# Altium PCB Plata.PcbDoc
Units mm, origin at the board's own origin, x right, y up, seen from the top; angles counter-clockwise.
Board outline 120 x 100 mm, 2 copper layers (Top Layer, Bottom Layer), stack 2.036 mm thick; 31 components, 28 nets, 100 pads, 0 vias.
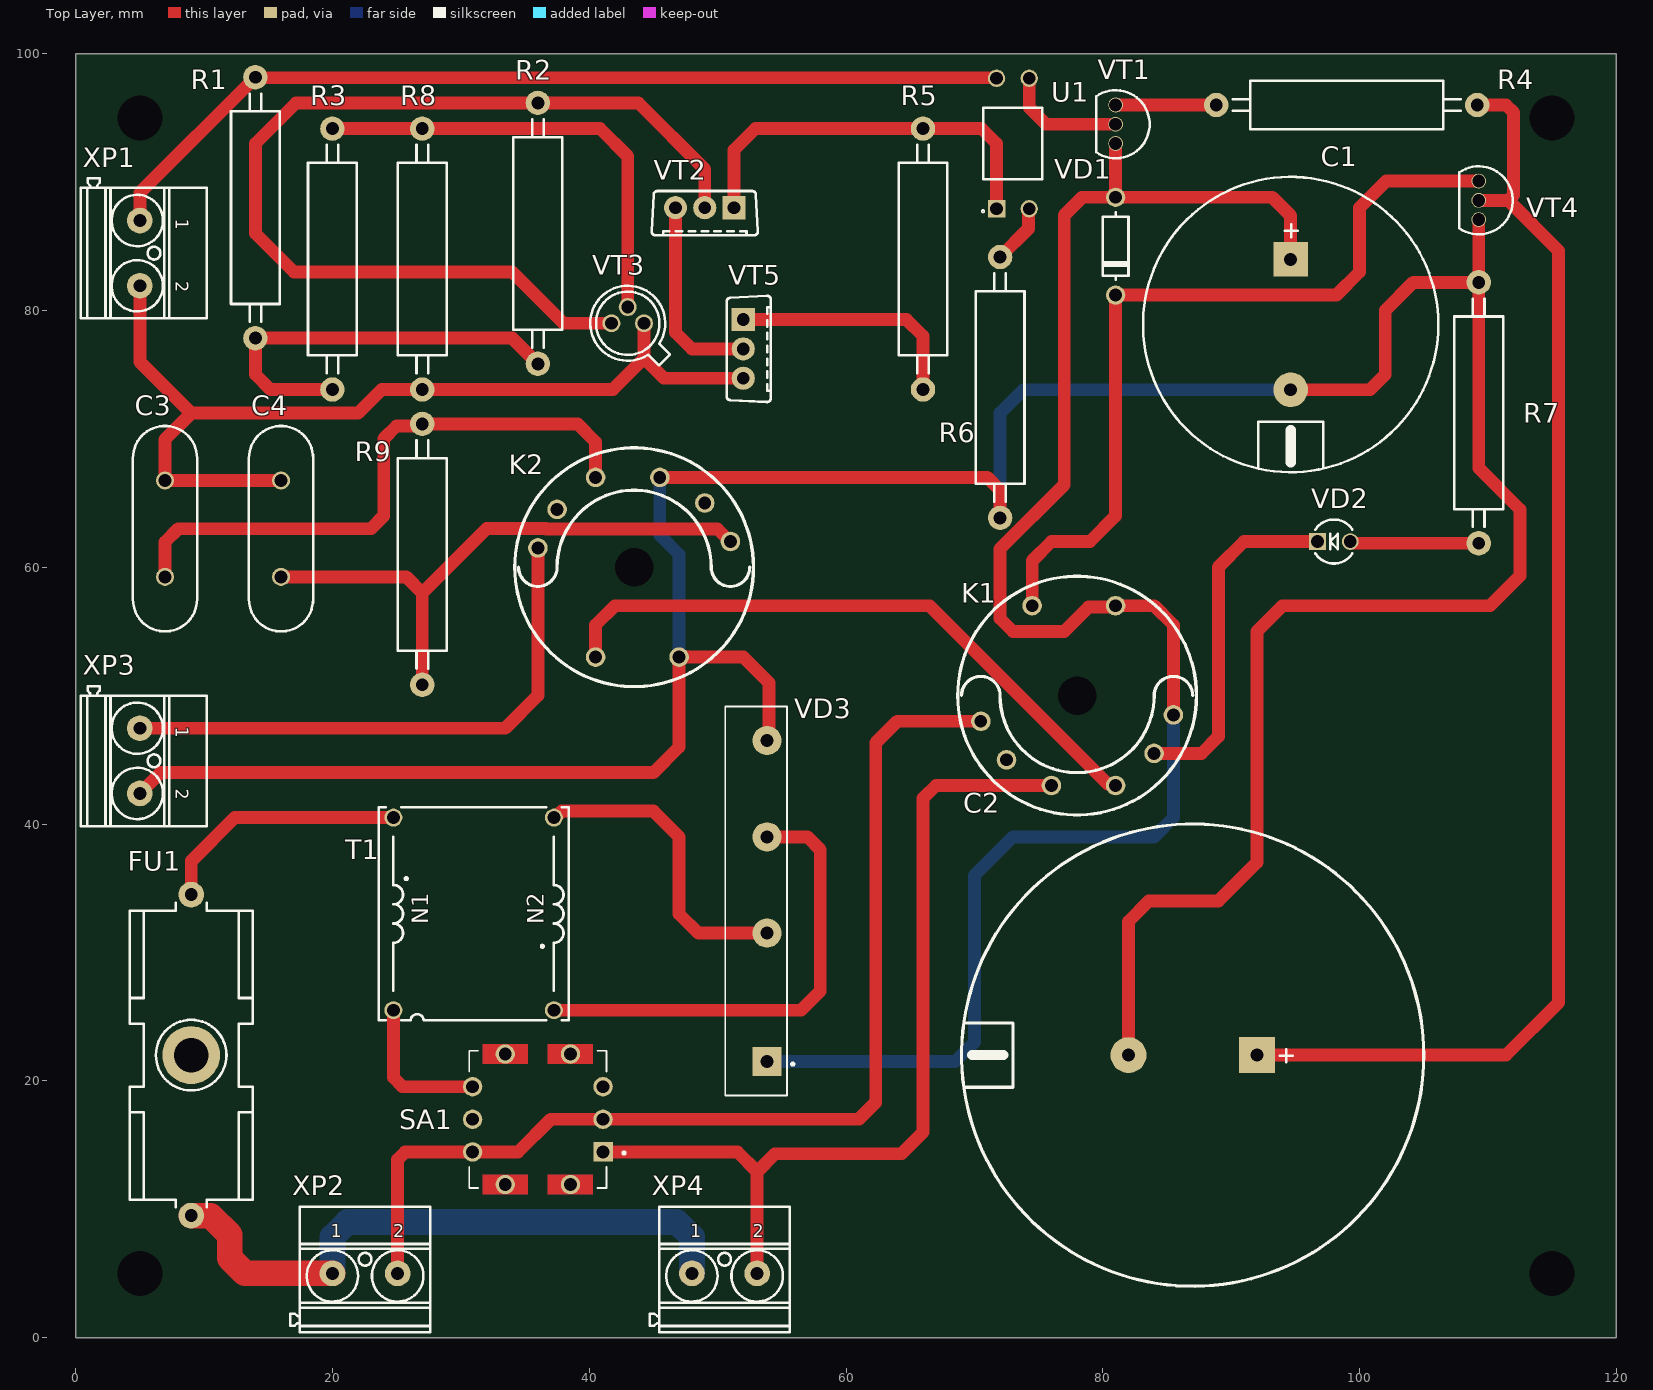
[diagram p0: Top Layer view]
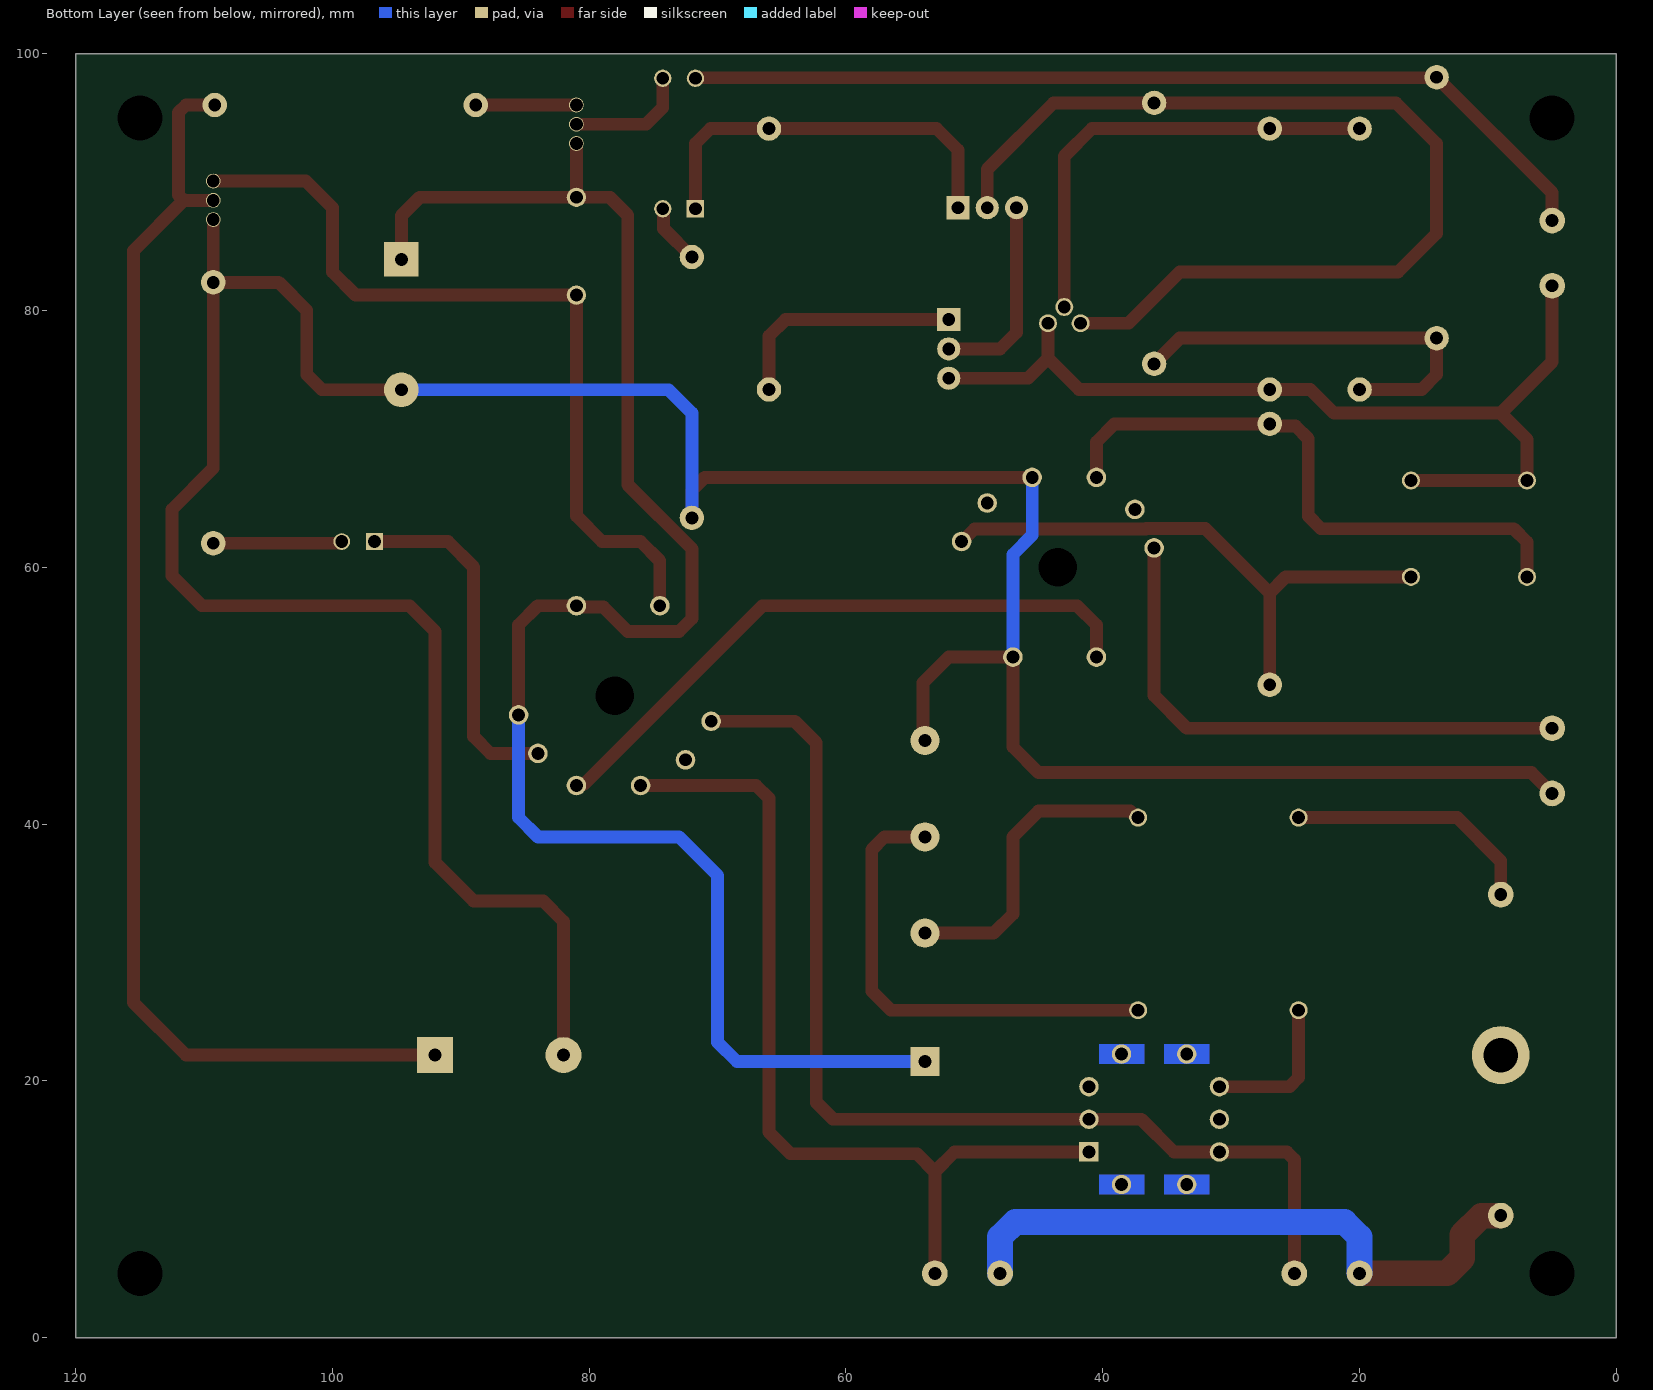
[diagram p1: Bottom Layer view, seen from below]
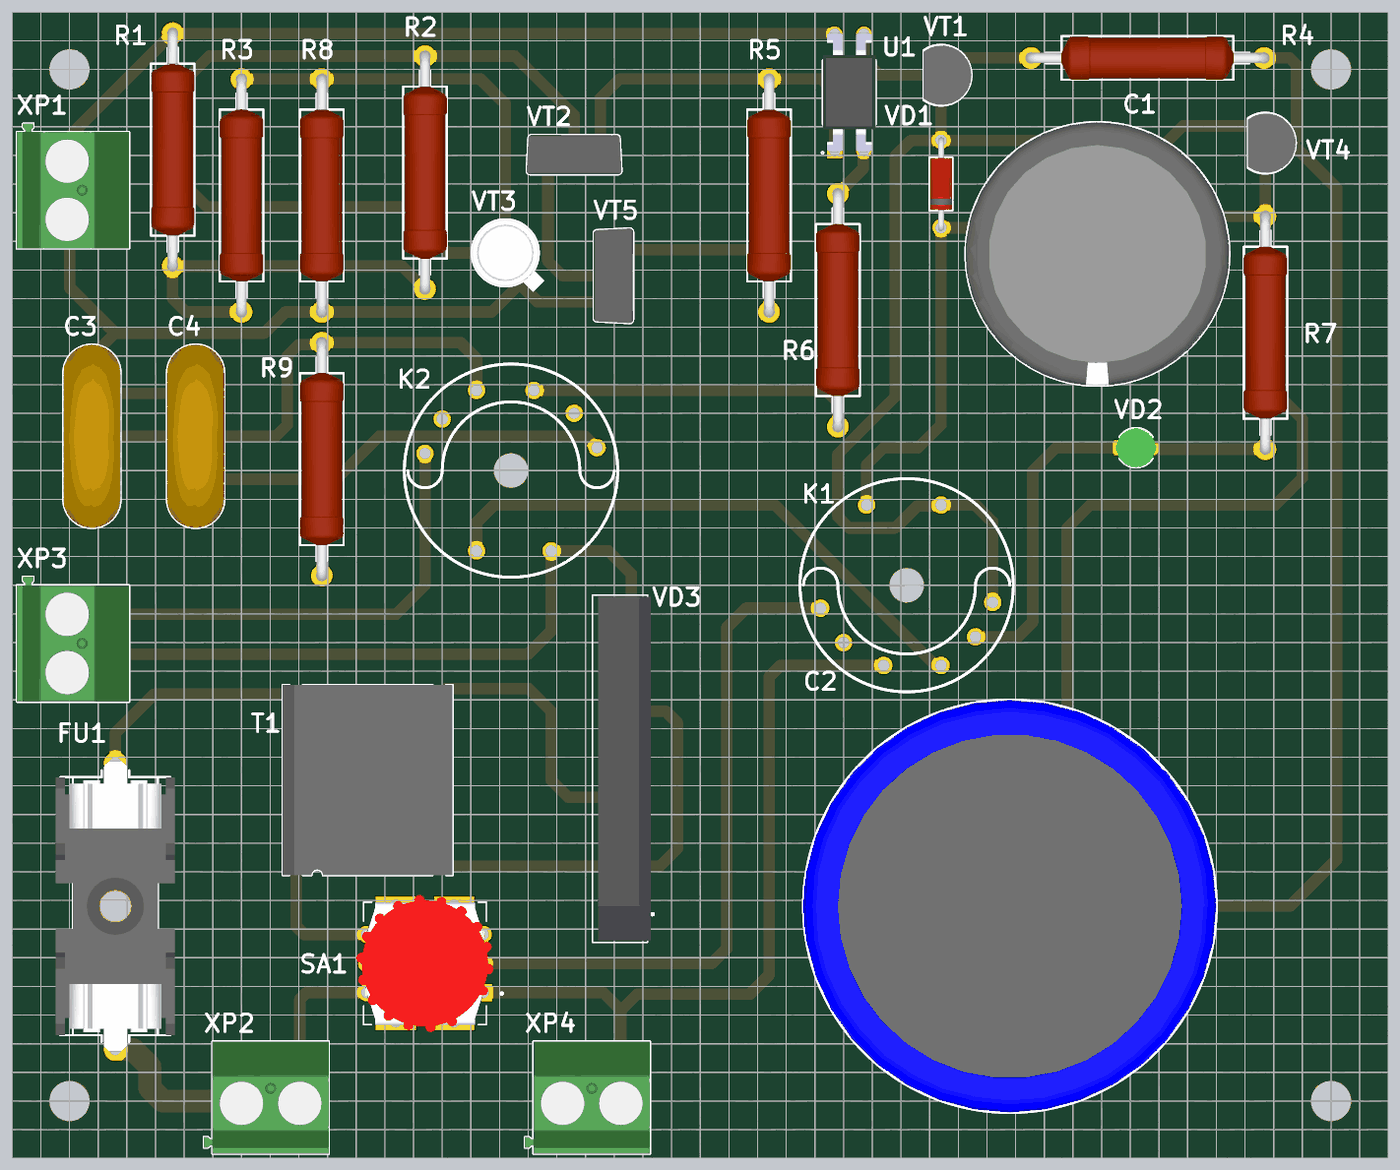
[diagram p2: 3D render of the assembled board from above, using the file's embedded part models]

## Layer stack, top to bottom
Top Solder: solder mask 0.01, Solder Resist, Dk 3.5
Top Layer: signal copper 0.018
Dielectric 1: dielectric 2, FR-4, Dk 4.8
Bottom Layer: signal copper 0.018
Bottom Solder: solder mask 0.01, Solder Resist, Dk 3.5

## Board outline
0,0 0,100 120,100 120,0

## Design rules (kind name [scope] priority, off if disabled: settings)
Clearance [All] p1: gap=0.254 ignorepadtopadclearanceinfootprint=FALSE except(0: Arc-Hole Track-Hole SMDPad-Hole THPad-Hole Via-Hole Fill-Hole Poly-Hole Region-Hole Text-Hole)
Height [All] p1: minheight=0 maxheight=100 prefheight=12.7
PolygonConnect [All] p1: connectstyle=Relief reliefconductorwidth=0.254 reliefentries=4 polygonreliefangle="90 Angle" airgapwidth=0.254
RoutingVias [All] p1: holewidth=0.711 width=1.27 viastyle="Through Hole" minholewidth=0.711 minwidth=1.27 maxholewidth=0.711 maxwidth=1.27
SolderMaskExpansion [All] p1: expansion=0.102 istentingtop=FALSE
Width [All] p1: maxlimit=2 minlimit=1 preferedwidth=1.5
29 further rules are at their usual default settings.

## Components (designator, comment, footprint, x,y, rotation, side; value= is the part's Value field where it differs from the comment)
C1 "1000 мк х 63В" CAPPR1000-2300X4200 94.633,78.899 r90 top
C2 "470мк х 6В" CAPPR1000-3600X5200 87,22 r0 top
C3 "1мк" CAP_CERAMIC 6.958,63 r90 top
C4 "1мк" CAP_CERAMIC 16,63 r90 top
FU1 "0.125А" P8029-12 9,22 r90 top
K1 "REL Simple" "Relay RES9" 78,50 r180 top
K2 "Rel2connected" "Relay RES9" 43.5,60 r0 top (schematic designator К2)
R1 "2.4м" "RES 2Wt" 14,88 r270 top
R2 "510к" "RES 2Wt" 36,86 r90 top
R3 "3м" "RES 2Wt" 20,84 r90 top
R4 "15к" "RES 2Wt" 99,96 r0 top
R5 "1к" "RES 2Wt" 66,84 r270 top
R6 "15к" "RES 2Wt" 72,74 r270 top
R7 "1.5к" "RES 2Wt" 109.28,72.027 r90 top
R8 "510к" "RES 2Wt" 27,84 r270 top
R9 "5.1м" "RES 2Wt" 27,61 r90 top
SA1 "3-positoin switch" NR01103ANG13-1C 36,17 r180 top
T1 "" T60403-D4097-X052 31,33 r0 top
U1 "АОД130А" "DIP-4, 7,5mm" 73,93 r90 top
VD1 "КД521А" DO-35 81,85 r90 top
VD2 "АЛ307В" GNL-3012GD 98,62 r0 top
VD3 "КД212А" GBJ 53,34 r90 top
VT1 "КТ3107К" TO-92AA-P152 81,94.5 r270 top
VT2 "КТ940А" TO-126-v 49,88 r180 top
VT3 "КТ3102А" TO-18 43,79 r270 top
VT4 "КТ829А" TO-92AA-P152 109.28,88.573 r270 top
VT5 "КТ940А" TO-126-v 52,77 r270 top
XP1 "Connector2-long" PHOENIX_1715721 5,84.46 r270 top
XP2 "ConnectorOP" PHOENIX_1715721 22.54,5 r0 top
XP3 "" PHOENIX_1715721 5,44.92 r270 top
XP4 "" PHOENIX_1715721 50.54,5 r0 top

## Footprints (in the part's own frame and the unit in brackets; to place one, negate y for a bottom-side part, rotate by r counter-clockwise, add the part's x,y. Pads: shape width x height; smd on the part's side, far side on the other; paste and mask are expansions set on the pad)
CAP_CERAMIC [mm] "Capacitor Radial Button, Pin spacing 7.5mm - Body Diameter  16mm X Body Width 5mm X Body Height 19mm"
  round 1.4 hole 1: 1(-3.75,0) 2(3.75,0)
  silkscreen extent -8,-2.5 8,2.5, body extent -8,-2.5 8,2.5, height 19
CAPPR1000-2300X4200 [mm] "Capacitor, Radial, Pins spacing 10mm - Body Diameter 23mm X Body  Height 42mm"
  rect 2.7x2.7 hole 1: 1(5.08,0)
  round 2.7 hole 1: 2(-5.08,0)
  silkscreen extent -11.5,-11.5 11.5,11.5, body extent -11.5,-11.5 11.5,11.5, height 42
CAPPR1000-3600X5200 [mm] "Capacitor, Radial, Leads spacing 10mm - Body Diameter 35.0mm X Body  Height 50.0mm"
  rect 2.8x2.8 hole 1: 1(5,0)
  round 2.8 hole 1: 2(-5,0)
  silkscreen extent -18,-18 18,18, body extent -18,-17.96 18,17.96, height 52
"DIP-4, 7,5mm" [mm]
  rect 1.35x1.35 / inner round 1.35 / far side rect 1.35x1.35 hole 1: 1(-5.08,1.27)
  round 1.35 hole 1: 2(-5.08,-1.27) 3(5.08,-1.27) 4(5.08,1.27)
  silkscreen extent -5.37,-2.29 2.8,2.43, body extent -5.21,-2.29 5.21,2.29, height 4.8
DO-35 [mm] "Diode, Axial, Body 4.6 x 2 mm (LxDia. max), Pin spacing 7.62mm"
  round 1.5 hole 1: 1(-3.81,0) 2(3.81,0)
  silkscreen extent -2.6,-1 2.65,1, body extent -4.08,-0.95 4.08,0.96, height 1.91
GBJ [mm]
  rect 2.27x2.27 hole 1: 1(-12.5,-0.85)
  round 2.27 hole 1: 2(-2.5,-0.85) 3(5,-0.85) 4(12.5,-0.85)
  silkscreen extent -15.15,-2.95 15.15,2.4, body extent -15,-2.7 15,1.91, height 27.04
GNL-3012GD [mm] "LED, Green, Body Dia. 3.43 mm, Pin spacing 2.54mm"
  rect 1.3x1.3 hole 1: 1(-1.27,0)
  round 1.3 hole 1: 2(1.27,0)
  silkscreen extent -1.44,-1.71 1.44,1.71, body extent -1.71,-1.71 1.72,1.72, height 9.85
NR01103ANG13-1C [mm] "Rotary switch"
  rect 1.508x1.508 hole 1: 1(-5.08,2.54)
  round 1.508 hole 1: 2(5.08,2.54) 3(5.08,0) 4(5.08,-2.54) 5(-5.08,-2.54) C(-5.08,0)
  round 1.508 hole 1 mask+0: S1(-2.54,5.08) S2(-2.54,-5.08) S3(2.54,-5.08) S4(2.54,5.08)
  Top Layer region: -0.79,-5.83 -4.29,-5.83 -4.29,-4.33 -0.79,-4.33
  Top Layer region: 4.29,-5.83 0.79,-5.83 0.79,-4.33 4.29,-4.33
  Top Layer region: 4.29,4.33 0.79,4.33 0.79,5.83 4.29,5.83
  Top Layer region: -0.79,4.33 -4.29,4.33 -4.29,5.83 -0.79,5.83
  Bottom Layer region: -0.79,4.33 -4.29,4.33 -4.29,5.83 -0.79,5.83
  Bottom Layer region: -0.79,-5.83 -4.29,-5.83 -4.29,-4.33 -0.79,-4.33
  Bottom Layer region: 4.29,-5.83 0.79,-5.83 0.79,-4.33 4.29,-4.33
  Bottom Layer region: 4.29,4.33 0.79,4.33 0.79,5.83 4.29,5.83
  silkscreen extent -6.8,-5.35 5.35,5.35, body extent -5.98,-5.98 5.98,5.98, height 20
P8029-12 [mm] "SCHURTER OGN Series, Fuse holder for 5x20mm Fuses"
  round 2 hole 1: 1(-12.5,0) 2(12.5,0)
  round 4.5 hole 2.7: 3(0,0)
  silkscreen extent -11.85,-4.8 11.85,4.8, body extent -12.8,-5.2 12.65,5.2, height 11.5
PHOENIX_1715721 [mm] "Terminal Block, 17.5A 250V, Pitch 5.08mm, 2 Positions, Screw Connection"
  round 2 hole 1: 1(-2.54,0) 2(2.54,0)
  silkscreen extent -5.82,-4.6 5.08,5.2, body extent -5.82,-4.6 5.08,5.2, height 14.2
"Relay RES9" [mm]
  round 1.5 hole 3: 0(0,0)
  round 1.524 hole 1: 1(-3,-7) 2(3.5,-7) 3(-7.5,1.5) 4(-6,4.5) 5(-3,7) 6(2,7) 7(5.5,5) 8(7.5,2)
  silkscreen extent -9.3,-9.3 9.3,9.3
"RES 2Wt" [mm] "Resistor, Axial, Pad spacing 20.32mm - Body Lengh 14mm X Body Diameter 3.5mm"
  round 1.9 hole 1: 1(-10.16,0) 2(10.16,0)
  silkscreen extent -8.89,-1.9 8.89,1.9, body extent -10.61,-1.9 10.61,1.9, height 3.8
T60403-D4097-X052 [mm] "Transformer"
  round 1.4 hole 1: 1(-6.25,-7.5) 3(6.25,-7.5) 4(6.25,7.5) 6(-6.25,7.5)
  silkscreen extent -7.4,-8.3 7.4,8.3, body extent -7.4,-8.3 7.4,8.3, height 13.5
TO-18 [mm] "TO-18  3 Leads, Pitch 2.54mm, Body Dia. 5.84mm, Leads Dia. 0.5mm"
  round 1.4 hole 1: 1(0,1.27) 2(-1.27,0) 3(0,-1.27)
  silkscreen extent -2.92,-2.92 3.28,3.28, body extent -2.92,-2.92 3.28,3.28, height 10.13
TO-92AA-P152 [mm] "TO-92 (TO-226),  Pitch 1.524mm, Flat Index, 3 In-Line, Axial Leads, Body Dia. 5.3mm, Leads Dia. 0.5mm (max)"
  round 1.15 hole 1: 1(1.5,0) 2(0,0) 3(-1.5,0)
  silkscreen extent -2.65,-1.52 2.65,2.65, body extent -2.59,-1.53 2.59,2.66, height 9.33
TO-126-v [mm] "TO-126 3-Terminal - Vertical Mount"
  rect 1.8x1.8 hole 1: 1(-2.28,0)
  round 1.8 hole 1: 2(0,0) 3(2.28,0)
  silkscreen extent -4.13,-1.3 4.13,2.15, body extent -4.13,-1.3 4.13,2.15, height 14.2

## Part data
C1: library part "CapPol 1000 мк х 63В"
C2: library part "CapPol 470мк х 6В"
C3 C4: library part Cap
FU1: library part "Fuse 0.125А"
R1: library part "res 2.4м 2Вт"
R2 R8: library part "res 510к 2Вт"
R3: library part "res 3м 2Вт"
R4 R6: library part "res 15к 2Вт"
R5: library part "res 1к 2Вт"
R7: library part "res 1.5к 2Вт"
R9: library part "res 5.1м 2Вт"
T1: library part TRANSFORMATOR-2
U1: library part "opt АОД130А"
VD1: library part "DIODE КД521А"
VD2: library part "LED АЛ307В"
VD3: library part BRIDGE
XP1: library part "Connector Long"
XP3 XP4: library part "Connector Classic"

## Free pads (board coordinates)
  round 1.524 hole 3.5: 2(5,5) 2(5,95) 2(115,5) 2(115,95)

## Nets (pads, with @x,y where several pads share a name; then routed paths per layer and width w, separated by ;. In a path a pad name is that pad's centre, name@x,y a point inside that pad or via, vN(x,y) a via of type N, cw(c..) or ccw(c..) an arc to the next point about the centre after c; other vN are vias at no path point)
NetC1_1: C1.1 K1.1 K1.3 VD1.2 VD3.1 VT1.1 | length 137.4
  Top Layer w1: VT1.1 VD1.2 ; K1.3 85.5,55.5 84,57 K1.1 80.9,56.9 78.9,56.9 77,55 73,55 72,56 72,61.43 77,66.43 77,87.416 78.394,88.81 VD1.2 ; C1.1 94.633,87.368 93.191,88.81 VD1.2
  Bottom Layer w1: VD3.1 68.5,21.5 70,23 70,36 73,39 84,39 85.516,40.516 85.516,48.484 K1.3
NetC1_2: C1.2 C2.2 K2.2 K2.6 R6.2 R7.2 VD3.4 VT4.1 XP3.2 | length 250.9
  Top Layer w1: XP3.2 6.62,44 45,44 47,46 K2.2 52,53 54,51 54,46.65 VD3.4 ; K2.6 71,67 72,66 R6.2 ; C2.2 82,32.414 83.586,34 89,34 92,37 92,55 94,57 110.16,57 112.5,59.34 112.5,64.5 109.28,67.72 R7.2 ; C1.2 100.819,73.819 102,75 102,80 104.187,82.187 R7.2 ; VT4.1 R7.2
  Bottom Layer w1: K2.6 45.5,62.5 47,61 K2.2 ; R6.2 72,72 73.819,73.819 C1.2
NetC2_1: C2.1 R4.2 VT4.2 | length 101.7
  Top Layer w1: C2.1 111.414,22 115.5,26.086 115.5,84.647 111.573,88.573 ; R4.2 111.414,96 112,95.414 112,89 111.573,88.573 ; VT4.2 111.573,88.573
NetC3_1: C3.1 K2.5 R9.2 | length 46.9
  Top Layer w1: C3.1 6.958,61.958 8,63 23,63 24,64 24,70 24.988,70.988 26.828,70.988 R9.2 39.101,71.16 40.5,69.761 K2.5
NetC3_2: C3.2 C4.2 R8.2 VT3.1 VT5.3 XP1.2 | length 74.9
  Top Layer w1: XP1.2 5,76 9,72 ; C4.2 C3.2 6.958,69.958 9,72 ; VT3.1 44.27,76.27 ; VT5.3 45.82,74.72 44.27,76.27 ; 9,72 22,72 23.84,73.84 R8.2 41.84,73.84 44.27,76.27
NetC4_1: C4.1 K2.8 R9.1 | length 45.2
  Top Layer w1: C4.1 25.75,59.25 27,58 ; R9.1 27,58 ; K2.8 50.968,62 49.984,62.984 36.66,62.984 36.628,63.016 32.016,63.016 27,58
NetFU1_1: FU1.1 XP2.1 XP4.1 | length 48.6
  Top Layer w2: FU1.1 10.5,9.5 12,8 12,6.172 13.172,5 XP2.1
  Bottom Layer w2: XP2.1 20,7.828 21.172,9 46.828,9 48,7.828 XP4.1
NetFU1_2: FU1.2 T1.6 | length 19.8
  Top Layer w1: FU1.2 9,37.107 12.393,40.5 T1.6
NetK1_2: K1.2 VD1.1 VT4.3 | length 63.5
  Top Layer w1: K1.2 74.5,60.5 76,62 79,62 81,64 VD1.1 98.19,81.19 100,83 100,88 102.073,90.073 VT4.3
NetK1_4: K1.4 VD2.1 | length 27.3
  Top Layer w1: K1.4 87.684,45.5 89,46.816 89,60 91,62 VD2.1
NetK1_5: K1.5 K2.1 | length 49.4
  Top Layer w1: K2.1 40.5,55.5 42,57 66.5,57 80.4,43.1 80.9,43.1 K1.5
NetK1_6: K1.6 SA1.1 XP4.2 | length 71.2
  Top Layer w1: SA1.1 51.54,14.46 53.08,12.92 ; XP4.2 53.08,12.92 ; K1.6 67,43 66,42 66,16 64.319,14.319 54.479,14.319 53.08,12.92
NetK1_8: K1.8 SA1.2 SA1.C XP2.2 | length 84.8
  Top Layer w1: XP2.2 25.08,13.874 25.666,14.46 SA1.2 34.46,14.46 37,17 SA1.C 61,17 62.322,18.322 62.322,46.322 64,48 K1.8
NetR1_1: R1.1 U1.4 XP1.1 | length 72.7
  Top Layer w1: XP1.1 5,89.16 R1.1 14.04,98.12 71.69,98.12 U1.4
NetR1_2: R1.2 R2.1 R3.1 | length 32.1
  Top Layer w1: R3.1 15.16,73.84 14,75 R1.2 34,77.84 R2.1
NetR2_2: R2.2 VT2.2 VT3.3 | length 79.1
  Top Layer w1: VT3.3 38,79 34,83 17,83 14,86 14,93 17.16,96.16 R2.2 43.84,96.16 49,91 VT2.2
NetR3_2: R3.2 R8.1 VT3.2 | length 35.6
  Top Layer w1: R3.2 R8.1 40.84,94.16 43,92 VT3.2
NetR4_1: R4.1 VT1.3 | length 7.8
  Top Layer w1: VT1.3 R4.1
NetR5_1: R5.1 U1.1 VT2.1 | length 30.2
  Top Layer w1: 51.28,89 51.28,92.485 52.955,94.16 R5.1 70.562,94.16 71.73,92.992 U1.1
NetR5_2: R5.2 VT5.1 | length 18.7
  Top Layer w1: VT5.1 64.72,79.28 66,78 R5.2
NetR6_1: R6.1 U1.2 | length 4.7
  Top Layer w1: R6.1 74.203,86.363 74.203,87.853 U1.2
NetR7_1: R7.1 VD2.2 | length 10.1
  Top Layer w1: VD2.2 99.351,62 99.484,61.867 R7.1
NetSA1_4: SA1.4 T1.1 | length 11.7
  Top Layer w1: T1.1 24.75,20.25 25.46,19.54 SA1.4
NetT1_3: T1.3 VD3.3 | length 36.9
  Top Layer w1: T1.3 56.5,25.5 58,27 58,38 57,39 VD3.3
NetT1_4: T1.4 VD3.2 | length 24.3
  Top Layer w1: T1.4 37.358,40.5 37.858,41 45,41 47,39 47,33 48.5,31.5 VD3.2
NetU1_3: U1.3 VT1.2 | length 9.5
  Top Layer w1: U1.3 74.27,95.812 75.582,94.5 VT1.2
NetVT2_3: VT2.3 VT5.2 | length 15.5
  Top Layer w1: VT2.3 46.72,78.28 48,77 VT5.2
NetXP3_1: K2.3 XP3.1 | length 43.7
  Top Layer w1: XP3.1 33.46,47.46 36,50 K2.3 K2.3@35.858,61.5
pads on no net: FU1.3 K1.0 K1.7 K2.0 K2.4 K2.7 SA1.3 SA1.5 SA1.S1 SA1.S2 SA1.S3 SA1.S4

## Polygon pours and split planes (outlines as drawn)
no net on Top Paste "NONET_L01_P000" (hatched 90Degree grid 2.5 track 0.1, pour order 0): 0,0 152.5,0 152.5,102.5 0,102.5
no net on Bottom Paste "NONET_L01_P-001" (hatched 90Degree grid 2.5 track 0.1): 0,0 152.5,0 152.5,102.5 0,102.5

## Text inside footprints (layer, text, board x,y; h text height)
T1: Top Overlay "N2" at 36.45,32.193 h1.27 r90; Top Overlay "N1" at 27.45,32.193 h1.27 r90; Mechanical 14 "N2" at 36.45,32.193 h1.27 r90; Mechanical 14 "N1" at 27.45,32.193 h1.27 r90
XP1: Top Overlay "2" at 7.8,82.276 h1 r270; Top Overlay "1" at 7.8,87.127 h1 r270; Mechanical 14 "1" at 7.8,87.127 h1 r270; Mechanical 14 "2" at 7.8,82.276 h1 r270
XP2: Top Overlay "1" at 19.873,7.8 h1; Top Overlay "2" at 24.724,7.8 h1; Mechanical 14 "2" at 24.724,7.8 h1; Mechanical 14 "1" at 19.873,7.8 h1
XP3: Top Overlay "2" at 7.8,42.736 h1 r270; Top Overlay "1" at 7.8,47.587 h1 r270; Mechanical 14 "1" at 7.8,47.587 h1 r270; Mechanical 14 "2" at 7.8,42.736 h1 r270
XP4: Top Overlay "1" at 47.873,7.8 h1; Top Overlay "2" at 52.724,7.8 h1; Mechanical 14 "2" at 52.724,7.8 h1; Mechanical 14 "1" at 47.873,7.8 h1